# Altium PCB GolgiBot_V2.02_Cabos.PcbDoc
Units mm, origin at the board's own origin, x right, y up, seen from the top; angles counter-clockwise.
Board outline 172.72 x 84.96 mm, 2 copper layers (Top Layer, Bottom Layer); 24 components, 27 nets, 119 pads, 82 vias.
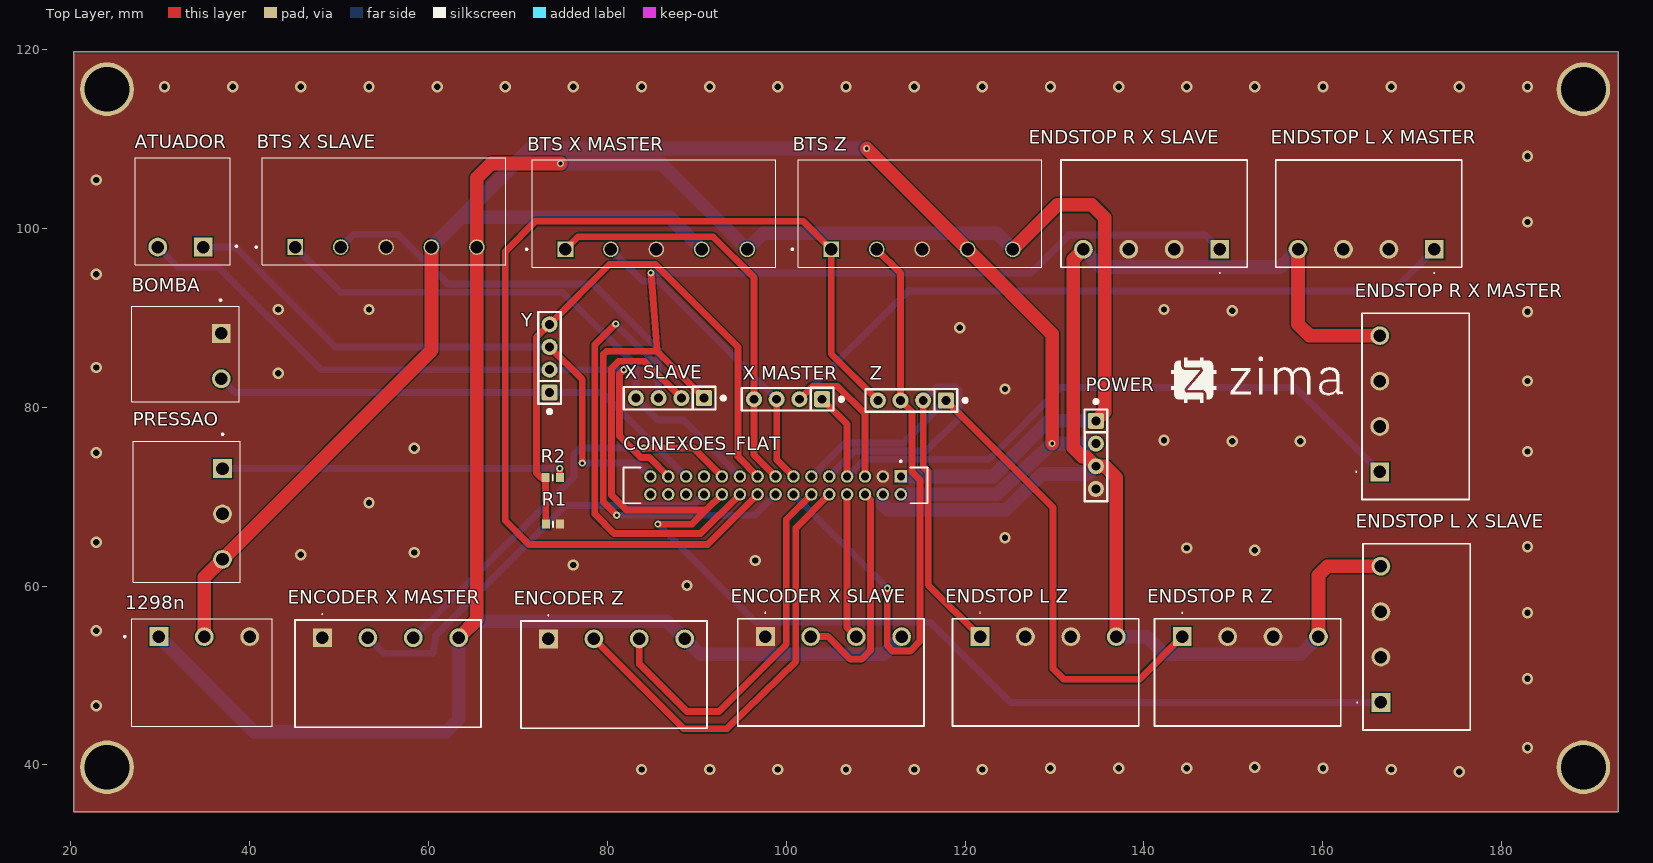
[diagram p0: Top Layer view]
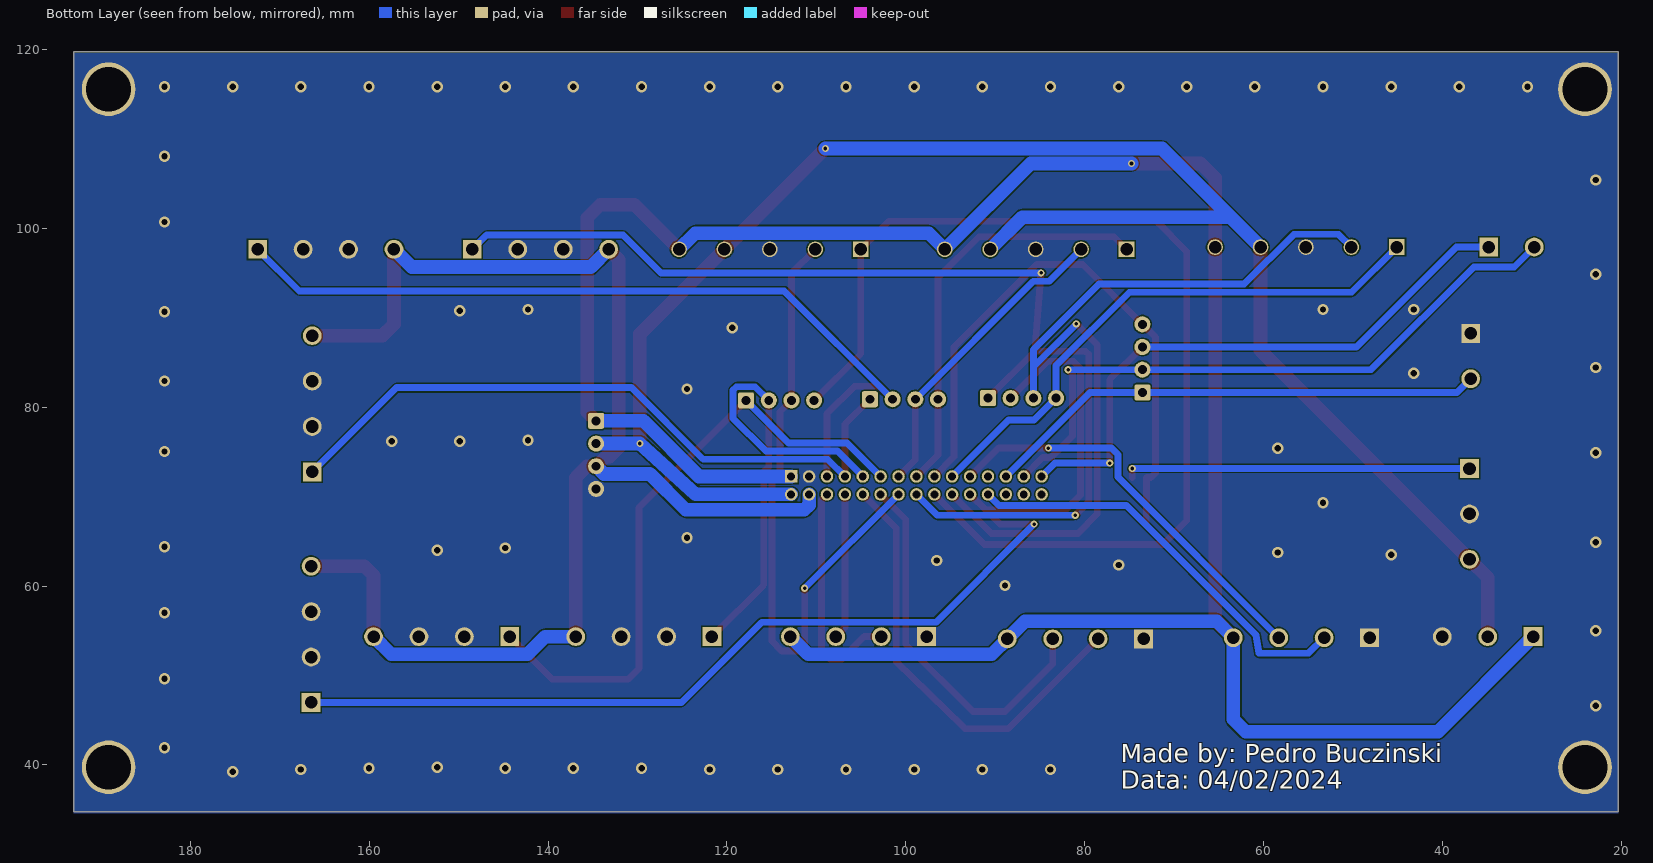
[diagram p1: Bottom Layer view, seen from below]
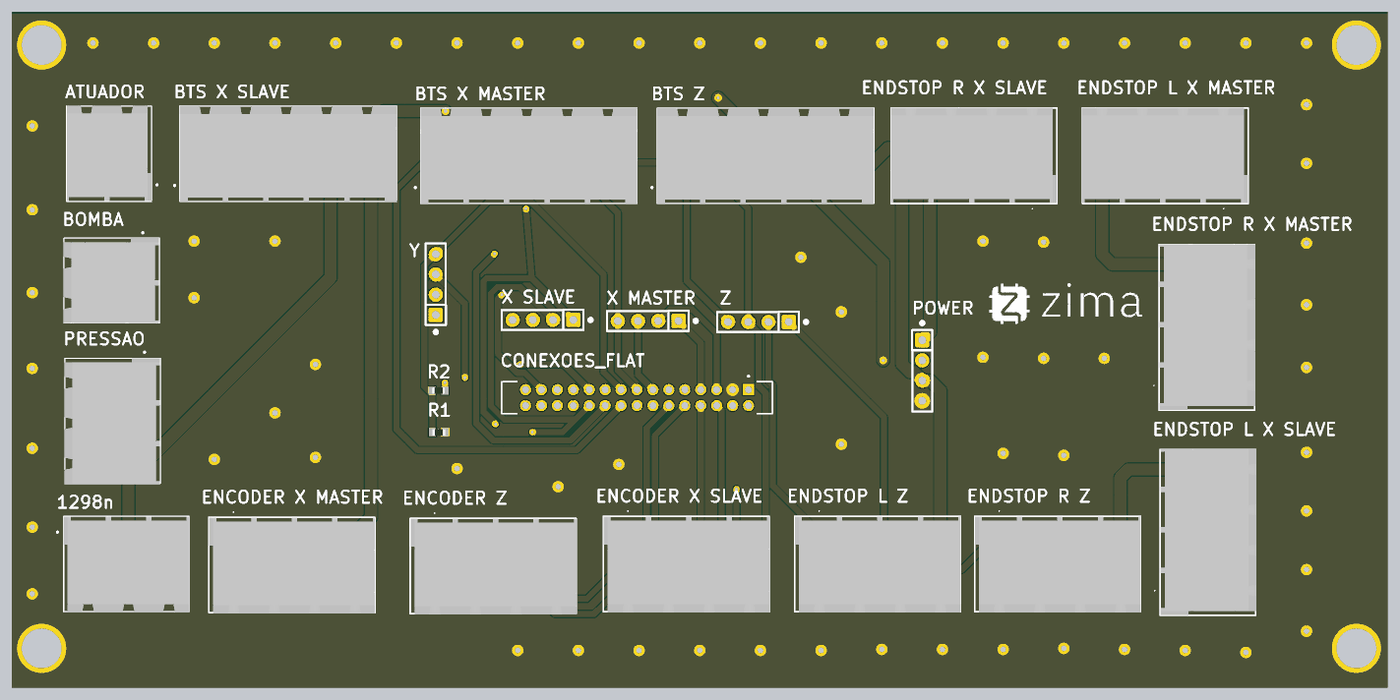
[diagram p2: 3D render of the assembled board from above, using the file's embedded part models]

## Layer stack, top to bottom
Top Solder: solder mask 0.0102, Solder Resist, Dk 3.5
Top Layer: signal copper 0.0356
Dielectric 1: dielectric 0.32, FR-4, Dk 4.8
Bottom Layer: signal copper 0.0356
Bottom Solder: solder mask 0.0102, Solder Resist, Dk 3.5

## Board outline
20.32,34.798 193.04,34.798 193.04,119.761 20.32,119.761

## Design rules (kind name [scope] priority, off if disabled: settings)
Clearance [All] p1: gap=0.152 ignorepadtopadclearanceinfootprint=FALSE except(0: Arc-Hole Track-Hole SMDPad-Hole THPad-Hole Via-Hole Fill-Hole Poly-Hole Region-Hole Text-Hole)
ComponentClearance [All] p1: gap=0.1 collisioncheckmode=3 verticalgap=0.1 showdistances=FALSE
HoleSize [All] p1: absolutevalues=TRUE maxlimit=5 minlimit=0.025 maxpercent=80.000 minpercent=20.000
MinimumSolderMaskSliver [All] p1: minsoldermaskwidth=0.1
PolygonConnect [All] p1: connectstyle=Direct reliefconductorwidth=0.254 reliefentries=4 polygonreliefangle="90 Angle" airgapwidth=0.254
RoutingVias [All] p1: holewidth=0.4 width=0.8 viastyle="Through Hole" minholewidth=0.3 minwidth=0.6 maxholewidth=0.5 maxwidth=1
SilkToSilkClearance [All] p1: silktosilkclearance=0
SilkToSolderMaskClearance [IsPad] p1: minsilkscreentomaskgap=0 clearancetoexposedcopper=TRUE
SolderMaskExpansion [All] p1: expansion=0.08 istentingtop=FALSE
Width [All] p1: maxlimit=1.524 minlimit=0.3 preferedwidth=0.762 minimp=50.000000 maximp=50.000000 favimp=50.000000
25 further rules are at their usual default settings.

## Components (designator, comment, footprint, x,y, rotation, side; value= is the part's Value field where it differs from the comment)
1298n "282814-3" TE_282814-3 34.925,54.356 r0 top
ATUADOR "282814-2" TE_282814-2 32.258,97.917 r180 top
BOMBA "282814-2" TE_282814-2 36.83,85.725 r270 top
"BTS X MASTER" "796638-5" TE_796638-5 75.311,97.663 r0 top
"BTS X SLAVE" "796638-5" TE_796638-5 45.085,97.917 r0 top
"BTS Z" "796638-5" TE_796638-5 105.029,97.663 r0 top
CONEXOES_FLAT "TCMD-15-D-20.00-01-RW" SAMTEC_TCMD-15-D-20.00-01-RW 98.805,71.263 r180 top
"ENCODER X MASTER" "282814-4" 2828144 48.133,54.229 r0 top
"ENCODER X SLAVE" "282814-4" 2828144 97.663,54.356 r0 top
"ENCODER Z" "282814-4" 2828144 73.406,54.102 r0 top
"ENDSTOP L X MASTER" "282814-4" 2828144 172.466,97.663 r180 top
"ENDSTOP L X SLAVE" "282814-4" 2828144 166.497,46.99 r90 top
"ENDSTOP L Z" "282814-4" 2828144 121.666,54.356 r0 top
"ENDSTOP R X MASTER" "282814-4" 2828144 166.37,72.771 r90 top
"ENDSTOP R X SLAVE" "282814-4" 2828144 148.463,97.663 r180 top
"ENDSTOP R Z" "282814-4" 2828144 144.272,54.356 r0 top
POWER "Testing PADS 1x4" "Testing PADS 1x4" 134.545,78.476 r270 top
PRESSAO "282814-3" TE_282814-3 36.957,68.072 r270 top
R1 "2K" RESC1608X55N 73.914,66.929 r0 top
R2 "2K" RESC1608X55N 73.876,72.136 r0 top
"X MASTER" "Testing PADS 1x4" "Testing PADS 1x4" 104.003,80.974 r180 top
"X SLAVE" "Testing PADS 1x4" "Testing PADS 1x4" 90.795,81.101 r180 top
Y "Testing PADS 1x4" "Testing PADS 1x4" 73.608,81.671 r90 top
Z "Testing PADS 1x4" "Testing PADS 1x4" 117.846,80.847 r180 top

## Footprints (in the part's own frame and the unit in brackets; to place one, negate y for a bottom-side part, rotate by r counter-clockwise, add the part's x,y. Pads: shape width x height; smd on the part's side, far side on the other; paste and mask are expansions set on the pad)
2828144 [mm]
  rect 2.1x2.1 hole 1.4: 1(0,0)
  round 2.1 hole 1.4: 2(5.08,0) 3(10.16,0) 4(15.24,0)
  silkscreen extent -3.08,-10 17.74,2.7, body extent -3.05,-10.06 17.77,1.94, height 7.85
RESC1608X55N [mm]
  rect 0.9x1 smd: 1(-0.8,0) 2(0.8,0)
  silkscreen extent 0,-0.33 0,0.33, body extent -0.8,-0.4 0.8,0.4, height 0.45
SAMTEC_TCMD-15-D-20.00-01-RW [mm]
  rect 1.398x1.398 / inner round 1.398 / far side rect 1.398x1.398 hole 0.89: 01(-14,-1)
  round 1.398 hole 0.89: 02(-14,1) 03(-12,-1) 04(-12,1) 05(-10,-1) 06(-10,1) 07(-8,-1) 08(-8,1) 09(-6,-1) 10(-6,1) 11(-4,-1) 12(-4,1) 13(-2,-1) 14(-2,1) 15(0,-1) 16(0,1) 17(2,-1) 18(2,1) 19(4,-1) 20(4,1) 21(6,-1) 22(6,1) 23(8,-1) 24(8,1) 25(10,-1) 26(10,1) 27(12,-1) 28(12,1) 29(14,-1) 30(14,1)
  silkscreen extent -17,-2.8 17,2
TE_282814-2 [mm]
  rect 2.1x2.1 hole 1.4: 1(-2.54,0)
  round 2.1 hole 1.4: 2(2.54,0)
  silkscreen extent -6.36,-10 5.08,2, body extent -5.58,-10.06 5.08,1.94, height 4.5
TE_282814-3 [mm]
  rect 2.1x2.1 hole 1.4: 1(-5.08,0)
  round 2.1 hole 1.4: 2(0,0) 3(5.08,0)
  silkscreen extent -9,-10 7.62,2, body extent -8.13,-10.06 7.61,1.94, height 4.5
TE_796638-5 [mm]
  rect 1.75x1.75 hole 1.4: 1(0,0)
  round 1.75 hole 1.4: 2(5.08,0) 3(10.16,0) 4(15.24,0) 5(20.32,0)
  silkscreen extent -4.45,-2 23.52,10, body extent -3.7,-2.03 23.52,9.97, height 4.5
"Testing PADS 1x4" [mm]
  rrect25% 1.8x1.8 hole 1: 1(-0.01,0.075)
  round 1.8 hole 1: 2(2.53,0.075) 3(5.07,0.075) 4(7.61,0.075)
  silkscreen extent -2.31,-1.2 8.97,1.34

## Part data
1298n ATUADOR BOMBA PRESSAO: "TERMI-BLOK HEADER,ASSY90 3P.5", Package=None, Availability=Unavailable, Price=None
  1298n PRESSAO: Centerline_Pitch="5.08 mm[.2 in]", EU_RoHS_Compliance=Compliant, MF="TE Connectivity", MP=282814-3, Number_of_Positions=3, SnapEDA_Link=https://www.snapeda.com/parts/282814-3/TE%20Connectivity%20AMP%20Connectors/view-part/970102/?ref=snap, TE_purchase_URL=https://www.te.com/usa-en/product-282814-3.html?te_bu=Cor&te_type=disp&te_campaign=seda_glo_cor-seda-global-disp-prtnr-fy19-seda-model-bom-cta_sma-317_1&elqCampaignId=32493
  ATUADOR BOMBA: MP=282814-2
"BTS X MASTER" "BTS X SLAVE" "BTS Z": "5 Position Terminal Block Header, Male Pins, Shrouded (4 Side) 0.200 (5.08mm) 90Â°, Right Angle Through Hole", Package=None, Availability=Good, Centerline_Pitch="5.08 mm[.2 in]", Check_prices=https://www.snapeda.com/parts/796638-5/TE%20Connectivity%20AMP%20Connectors/view-part/275803/?ref=eda, EU_RoHS_Compliance=Compliant, MF="TE Connectivity", MP=796638-5, Number_of_Positions=5, Price=None, Purchase-URL=https://pricing.snapeda.com/search/part/796638-5/?ref=eda, SnapEDA_Link=https://www.snapeda.com/parts/796638-5/TE%20Connectivity%20AMP%20Connectors/view-part/275803/?ref=snap
CONEXOES_FLAT: "TCMD Series 2.00 mm IDC Ribbon Cable Assembly, Terminal", Package=None, Check_prices=https://www.snapeda.com/parts/TCMD-15-D-20.00-01-RW/Samtec/view-part/?ref=eda, MF=Samtec, MP=TCMD-15-D-20.00-01-RW, SnapEDA_Link=https://www.snapeda.com/parts/TCMD-15-D-20.00-01-RW/Samtec/view-part/?ref=snap
"ENCODER X MASTER" "ENCODER X SLAVE" "ENCODER Z" "ENDSTOP L X MASTER" "ENDSTOP L X SLAVE" "ENDSTOP L Z" "ENDSTOP R X MASTER" "ENDSTOP R X SLAVE" "ENDSTOP R Z": "Connector", Manufacturer_Name="TE Connectivity", Mouser Part Number=571-282814-4, Arrow Part Number=282814-4, Arrow Price/Stock=https://www.arrow.com/en/products/282814-4/te-connectivity?region=nac, Datasheet Link=https://www.te.com/commerce/DocumentDelivery/DDEController?Action=showdoc&DocId=Customer+Drawing%7F282814%7FC1%7Fpdf%7FEnglish%7FENG_CD_282814_C1.pdf%7F282814-4, Height=8.5mm, Manufacturer_Part_Number=282814-4, Mouser Price/Stock=https://www.mouser.co.uk/ProductDetail/TE-Connectivity/282814-4?qs=79%2FjLZ2kXkrgi3RIXIXGaA%3D%3D
POWER "X MASTER" "X SLAVE" Y Z: "Headers & Wire Housings 40Pin 2mm Spacing Single Row Hdrs, 5pc", Manufacturer=Cromax, Manufacturer Part Number=-, Accessory Type=-, Brand=Cromax, Category="Headers & Wire Housings", ComponentLink1Description=-, ComponentLink1URL=-, Contact Gender="Pin (Female)", Contact Plating=Gold, Contact Type=-, Minimum Order Quantity=1, Mounting Angle=Vertical, Mounting Style="Straight Pin", Number of Positions="40 Position", Number of Rows="1 Row", Pitch="2 mm", Pricing 1="1=1.60, 2=0.80 (BRL)", Product=Headers, Product Category=Accessories, Reeling=False, RoHS="RoHS Compliant", RoHS - Mouser=Y, Row Spacing=-, Stock 1=14, Supplier 1=-, Supplier Part Number 1=-, Termination Style="Through Hole", Type=Breakaway
R1 R2: library part ERJ-3EKF1001V, "Resistor", Manufacturer_Name=Panasonic, Mouser Part Number=667-ERJ-3EKF1001V, Arrow Part Number=ERJ-3EKF1001V, Arrow Price/Stock=https://www.arrow.com/en/products/erj-3ekf1001v/panasonic?region=nac, Datasheet Link=http://industrial.panasonic.com/cdbs/www-data/pdf/RDA0000/AOA0000C86.pdf, Height=0.55mm, Manufacturer_Part_Number=ERJ-3EKF1001V, Mouser Price/Stock=https://www.mouser.co.uk/ProductDetail/Panasonic/ERJ-3EKF1001V?qs=H7k1u0Mp9JTM8yQxOuvoDg%3D%3D

## Free pads (board coordinates)
  round 6 hole 5: 2(24.04,39.755) 2(24.04,115.574) 2(189.14,39.755) 2(189.14,115.574)

## Via types
v1: diameter 1.27, hole 0.711, Top Layer to Bottom Layer, 70 vias
v2: diameter 0.8, hole 0.4, Top Layer to Bottom Layer, 12 vias

## Nets (pads, with @x,y where several pads share a name; then routed paths per layer and width w, separated by ;. In a path a pad name is that pad's centre, name@x,y a point inside that pad or via, vN(x,y) a via of type N, cw(c..) or ccw(c..) an arc to the next point about the centre after c; other vN are vias at no path point)
+3V3: "ENDSTOP L X MASTER.4" "ENDSTOP L X SLAVE.4" "ENDSTOP L Z.4" "ENDSTOP R X MASTER.4" "ENDSTOP R X SLAVE.4" "ENDSTOP R Z.4" CONEXOES_FLAT.04 POWER.3 | length 156.1
  Top Layer w1.524: 133.223,97.663 132.08,96.52 132.08,75.489 133.096,74.473 133.553,74.473 POWER.3 135.636,73.406 136.906,72.136 136.906,54.356 ; 157.226,97.663 157.226,89.281 158.496,88.011 166.37,88.011 ; 159.512,54.356 159.512,61.214 160.528,62.23 166.497,62.23
  Bottom Layer w1.524: CONEXOES_FLAT.04 110.805,69.078 111.35,68.533 124.601,68.533 128.61,72.542 133.756,72.542 POWER.3 ; 133.223,97.663 135.204,95.682 155.245,95.682 157.226,97.663 ; 136.906,54.356 140.31,54.356 142.291,52.375 157.531,52.375 159.512,54.356
+5: 1298n.2 "BTS X MASTER.4" "BTS X SLAVE.4" "BTS Z.4" CONEXOES_FLAT.02 POWER.2 PRESSAO.3 | length 201.3
  Top Layer w1.524: 1298n.2 34.925,60.96 PRESSAO.3 60.325,86.36 60.325,97.917 ; v2(108.991,108.941) 120.269,97.663 129.725,88.207 v2(129.725,75.946)
  Bottom Layer w1.524: 60.325,97.917 63.678,101.27 ; 90.551,97.663 86.944,101.27 63.678,101.27 ; v2(108.991,108.941) 71.349,108.941 63.678,101.27 ; CONEXOES_FLAT.02 123.484,70.263 v2(129.725,75.946) POWER.2
+12: 1298n.1 "BTS X MASTER.5" "BTS X SLAVE.5" "BTS Z.5" "ENCODER X MASTER.4" "ENCODER X SLAVE.4" "ENCODER Z.4" CONEXOES_FLAT.01 POWER.1 | length 279.1
  Top Layer w1.524: 63.373,54.229 65.405,56.261 65.405,97.917 65.405,105.664 67.005,107.264 v2(74.752,107.264) ; 125.349,97.663 130.327,102.641 134.163,102.641 135.611,101.194 135.611,79.477 POWER.1
  Bottom Layer w1.524: 1298n.1 40.488,43.713 61.976,43.713 63.373,45.11 63.373,54.229 65.227,56.083 86.665,56.083 88.646,54.102 90.373,52.375 110.922,52.375 112.903,54.356 ; v2(74.752,107.264) 86.03,107.264 95.631,97.663 97.434,99.466 123.546,99.466 125.349,97.663 ; CONEXOES_FLAT.01 123.114,72.263 129.337,78.486 POWER.1
encoder_a_x_master: "ENCODER X MASTER.3" CONEXOES_FLAT.21 | length 46.1
  Top Layer w0.762: v2(84.049,75.438) 89.63,75.438 CONEXOES_FLAT.21
  Bottom Layer w0.762: 58.293,54.229 76.258,72.194 76.258,74.695 77.001,75.438 v2(84.049,75.438)
encoder_a_x_slave: "ENCODER X SLAVE.3" CONEXOES_FLAT.08 | length 16.3
  Top Layer w0.762: CONEXOES_FLAT.08 106.805,55.374 107.823,54.356
encoder_a_z: "ENCODER Z.3" CONEXOES_FLAT.12 | length 42.5
  Top Layer w0.762: 83.566,54.102 83.566,51.308 88.9,45.974 92.481,45.974 100,53.492 100,67.458 CONEXOES_FLAT.12
encoder_b_x_master: "ENCODER X MASTER.2" CONEXOES_FLAT.24 | length 46.6
  Bottom Layer w0.762: 53.213,54.229 54.94,52.502 60.503,52.502 60.833,54.534 75.311,69.012 89.554,69.012 CONEXOES_FLAT.24
encoder_b_x_slave: "ENCODER X SLAVE.2" CONEXOES_FLAT.06 | length 25.8
  Top Layer w0.762: 102.743,54.356 104.648,54.356 107.188,51.816 108.407,51.816 109.423,52.832 109.423,69.645 CONEXOES_FLAT.06
encoder_b_z: "ENCODER Z.2" CONEXOES_FLAT.10 | length 50
  Top Layer w0.762: 78.486,54.102 88.504,44.084 88.529,44.059 93.073,44.059 93.384,44.059 93.607,44.277 101.067,51.587 101.067,66.525 CONEXOES_FLAT.10
endstop_l_x_master: "ENDSTOP L X MASTER.1" "X MASTER.2" CONEXOES_FLAT.05 | length 94.2
  Top Layer w0.762: 101.473,80.899 102.921,82.347 105.74,82.347 108.805,79.282 CONEXOES_FLAT.05
  Bottom Layer w0.762: 101.473,80.899 113.589,93.015 167.818,93.015 172.466,97.663
endstop_l_x_slave: "ENDSTOP L X SLAVE.1" "X SLAVE.2" CONEXOES_FLAT.22 | length 132.9
  Top Layer w0.762: v2(85.649,66.929) 89.471,66.929 91.046,68.504 ; 88.265,81.026 84.151,85.14 81.252,85.14 80.441,84.328 80.441,70.207 82.144,68.504 91.046,68.504 ; CONEXOES_FLAT.22 91.046,68.504
  Bottom Layer w0.762: v2(85.649,66.929) 96.622,55.956 116.103,55.956 125.07,46.99 166.497,46.99
endstop_l_z: "ENDSTOP L Z.1" CONEXOES_FLAT.09 Z.2 | length 54.2
  Top Layer w0.762: Z.2 115.316,73.38 115.874,72.822 115.874,60.148 121.666,54.356
  Bottom Layer w0.762: CONEXOES_FLAT.09 107.644,75.102 115.641,75.102 119.304,78.765 119.304,81.915 118.923,82.296 116.84,82.296 Z.2
endstop_r_x_master: "ENDSTOP R X MASTER.1" "X MASTER.1" CONEXOES_FLAT.07 | length 77.4
  Top Layer w0.762: 104.013,80.899 106.805,78.107 CONEXOES_FLAT.07
  Bottom Layer w0.762: CONEXOES_FLAT.07 108.73,74.188 122.651,74.188 130.658,82.194 156.947,82.194 166.37,72.771
endstop_r_x_slave: "ENDSTOP R X SLAVE.1" "X SLAVE.1" CONEXOES_FLAT.16 | length 125.7
  Top Layer w0.762: v2(81.051,67.92) 79.527,69.444 79.527,85.902 79.883,86.258 85.573,86.258 ; v2(84.861,95.021) 85.573,86.258 ; 90.805,81.026 85.573,86.258
  Bottom Layer w0.762: v2(81.051,67.92) 96.462,67.92 CONEXOES_FLAT.16 ; v2(84.861,95.021) 127.356,95.021 131.597,99.263 146.863,99.263 148.463,97.663
endstop_r_z: "ENDSTOP R Z.1" CONEXOES_FLAT.11 Z.1 | length 70.4
  Top Layer w0.762: Z.1 129.819,68.809 129.819,50.8 131.039,49.581 139.497,49.581 144.272,54.356
  Bottom Layer w0.762: CONEXOES_FLAT.11 106.558,76.016 113.1,76.016 Z.1
GND: 1298n.3 "BTS X MASTER.3" "BTS X SLAVE.3" "BTS Z.3" "ENCODER X MASTER.1" "ENCODER X SLAVE.1" "ENCODER Z.1" "ENDSTOP L X MASTER.2" "ENDSTOP L X MASTER.3" "ENDSTOP L X SLAVE.2" "ENDSTOP L X SLAVE.3" "ENDSTOP L Z.2" "ENDSTOP L Z.3" "ENDSTOP R X MASTER.2" "ENDSTOP R X MASTER.3" "ENDSTOP R X SLAVE.2" "ENDSTOP R X SLAVE.3" "ENDSTOP R Z.2" "ENDSTOP R Z.3" BOMBA.1 CONEXOES_FLAT.03 pad.2 POWER.4 PRESSAO.2 R1.2
  other v1: 175.26,39.243 83.82,39.497 91.44,39.497 99.06,39.497 106.68,39.497 114.3,39.497 121.92,39.497 167.64,39.497 129.54,39.624 137.16,39.624 144.78,39.624 160.02,39.624 152.4,39.751 182.88,41.91 22.86,46.609 182.88,49.657 22.86,54.991 182.88,57.023 88.9,60.071 76.2,62.357 96.52,62.865 45.72,63.5 58.42,63.754 152.4,64.008 144.78,64.262 182.88,64.389 22.86,64.897 124.46,65.405 53.34,69.342 22.86,74.93 182.88,75.057 58.42,75.438 149.86,76.2 157.48,76.2 142.24,76.327 124.46,82.042 182.88,82.931 43.18,83.82 22.86,84.455 119.38,88.9 182.88,90.678 149.86,90.805 43.18,90.932 53.34,90.932 142.24,90.932 22.86,94.869 182.88,100.711 22.86,105.41 182.88,108.077 30.48,115.824 38.1,115.824 45.72,115.824 53.34,115.824 60.96,115.824 68.58,115.824 76.2,115.824 83.82,115.824 91.44,115.824 99.06,115.824 106.68,115.824 114.3,115.824 121.92,115.824 129.54,115.824 137.16,115.824 144.78,115.824 152.4,115.824 160.02,115.824 167.64,115.824 175.26,115.824 182.88,115.824
HV1: BOMBA.2 CONEXOES_FLAT.25 Y.1 | length 56.5
  Bottom Layer w0.762: BOMBA.2 38.354,81.661 Y.1 79.407,81.661 CONEXOES_FLAT.25
HV3: ATUADOR.2 CONEXOES_FLAT.27 Y.2 | length 72.7
  Top Layer w0.762: v2(81.839,84.201) 81.355,83.717 81.355,76.774 83.746,74.383 84.685,74.383 CONEXOES_FLAT.27
  Bottom Layer w0.762: ATUADOR.2 31.953,95.682 36.474,95.682 47.955,84.201 Y.2 v2(81.839,84.201)
HV4: ATUADOR.1 CONEXOES_FLAT.29 Y.3 | length 66.1
  Top Layer w0.762: Y.3 77.191,83.083 v2(77.191,73.762)
  Bottom Layer w0.762: ATUADOR.1 38.43,97.917 49.606,86.741 Y.3 ; v2(77.191,73.762) 83.306,73.762 CONEXOES_FLAT.29
motor_l_x_master: "BTS X MASTER.1" "X MASTER.4" CONEXOES_FLAT.15 | length 46.8
  Top Layer w0.762: 75.311,97.663 76.719,99.071 91.81,99.071 96.393,94.488 96.393,80.899 96.393,74.675 CONEXOES_FLAT.15
motor_l_x_slave: "BTS X SLAVE.1" "X SLAVE.4" CONEXOES_FLAT.19 | length 62.5
  Bottom Layer w0.762: 45.085,97.917 50.14,92.862 74.999,92.862 83.185,84.676 83.185,81.026 85.649,78.562 88.506,78.562 CONEXOES_FLAT.19
motor_l_z: "BTS Z.1" CONEXOES_FLAT.18 Z.4 | length 120
  Top Layer w0.762: CONEXOES_FLAT.18 91.21,64.668 71.222,64.668 68.58,67.31 68.58,97.434 71.958,100.813 101.879,100.813 105.029,97.663 105.029,85.979 Z.4
motor_r_x_master: "BTS X MASTER.2" "X MASTER.3" CONEXOES_FLAT.13 | length 34.9
  Top Layer w0.762: 98.933,80.899 98.933,74.135 CONEXOES_FLAT.13
  Bottom Layer w0.762: 80.391,97.663 83.966,94.088 85.744,94.088 98.933,80.899
motor_r_x_slave: "BTS X SLAVE.2" "X SLAVE.3" CONEXOES_FLAT.20 | length 94.9
  Top Layer w0.762: v2(80.925,89.332) 78.588,86.995 78.588,68.047 80.747,65.888 90.43,65.888 CONEXOES_FLAT.20
  Bottom Layer w0.762: 50.165,97.917 51.587,99.339 56.591,99.339 62.154,93.777 78.384,93.777 85.725,86.436 85.725,84.532 ; v2(80.925,89.332) 85.725,84.532 ; 85.725,81.026 85.725,84.532
motor_r_z: "BTS Z.2" CONEXOES_FLAT.14 Z.3 | length 71.4
  Top Layer w0.762: 110.109,97.663 112.776,94.996 Z.3 114.046,79.502 114.046,72.782 114.96,71.868 114.96,53.848 113.868,52.756 111.887,52.756 111.303,53.34 v2(111.303,59.765)
  Bottom Layer w0.762: CONEXOES_FLAT.14 v2(111.303,59.765)
NetPRESSAO_1: PRESSAO.1 R2.2 | length 38.7
  Top Layer w0.762: R2.2 v2(74.676,73.152)
  Bottom Layer w0.762: PRESSAO.1 v2(74.676,73.152)
pressao: CONEXOES_FLAT.17 R1.1 R2.1 Y.4 | length 66.7
  Top Layer w0.762: R1.1 73.114,69.494 73.076,69.532 R2.1 72.593,72.136 72.085,72.644 72.085,87.833 Y.4 80.206,95.954 85.376,95.954 94.59,86.741 94.59,74.478 CONEXOES_FLAT.17
pads on no net: CONEXOES_FLAT.23 CONEXOES_FLAT.26 CONEXOES_FLAT.28 CONEXOES_FLAT.30

## Polygon pours and split planes (outlines as drawn)
GND on Top Layer "GND_L01_P003" (solid, pour order 3): 20.32,119.634 20.447,119.507 193.04,119.507 193.04,34.798 192.913,34.671 20.32,34.671
GND on Bottom Layer "GND_L02_P001" (solid, pour order 1): 20.32,119.57 193.04,119.57 193.04,34.608 20.32,34.608

## Silkscreen, mask and mechanical layers (free items; w line width, h text height)
Top Overlay:
  drawing of 7 lines, arcs and shapes, not listed
Bottom Overlay:
  text "Made by: Pedro Buczinski" at 75.946,40.301 h2.03
  text "Data: 04/02/2024" at 75.946,37.338 h2.03